# EAGLE board _EmbeddedPCB.0f97f602-2c7d-4791-9238-98ac81d9567d_LV1 (EAGLE 9.7.0)
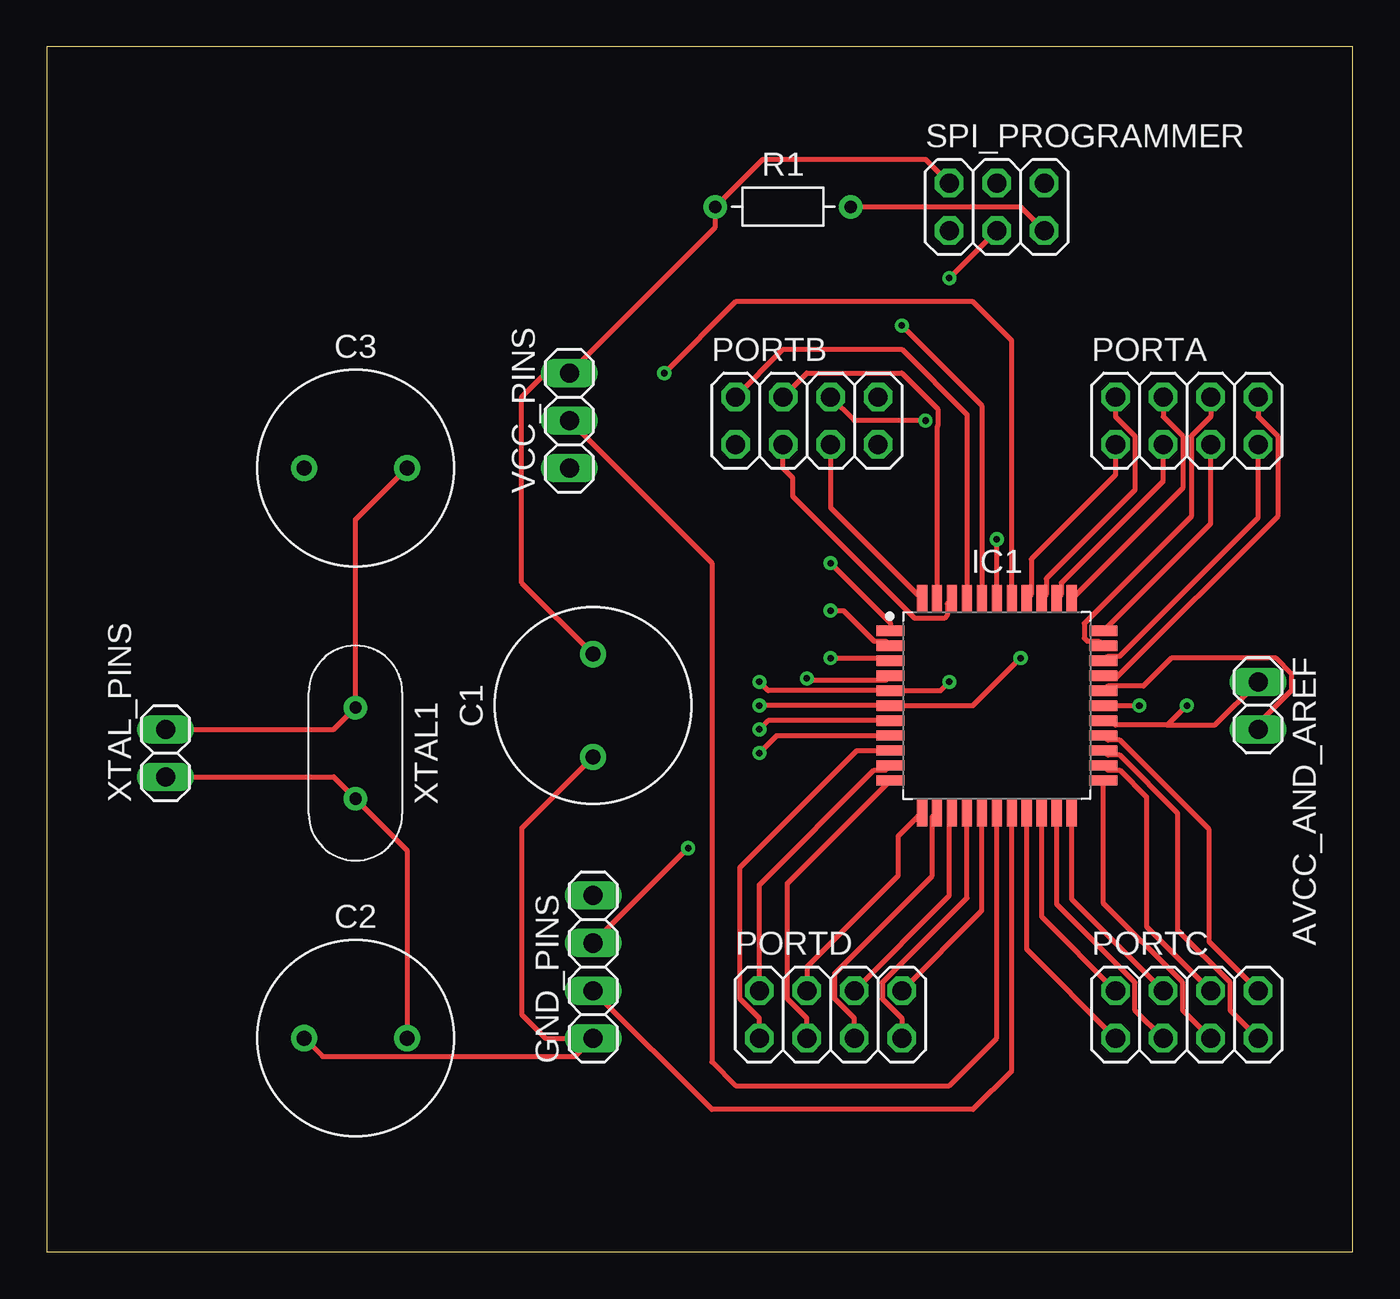
[diagram p0: board, top side]
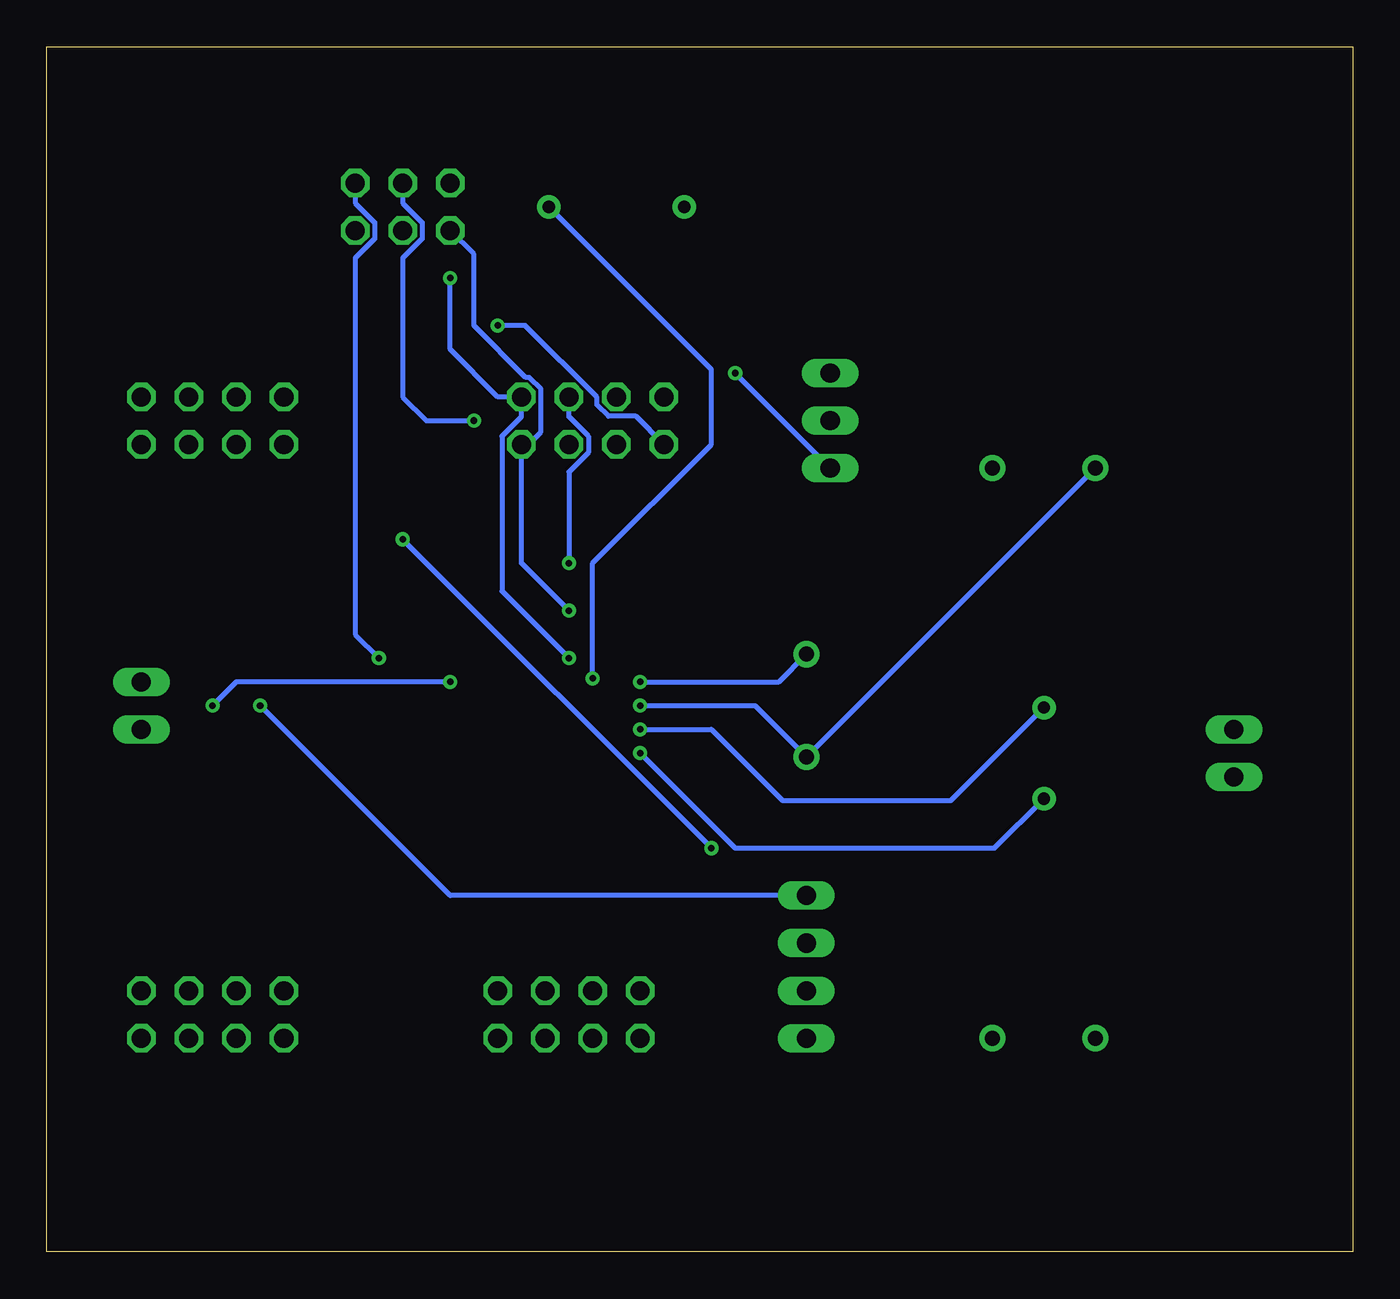
[diagram p1: board, bottom side, seen from below]

Size 69.83 x 64.44 mm. Coordinates in mm from the lower left corner, seen from the top.
Outline: 0,0 69.83,0 69.83,64.44 0,64.44 0,0
Copper layers (1*16): Top 0.035mm / dielectric 1.5mm / Bottom 0.035mm
Design rules "default": minimum track width 6mil, minimum drill 0.35mm, track to track 6mil, track to pad 6mil, pad to pad 6mil, via to via 6mil, smd to smd 6mil, copper to edge 40mil, drill to drill 6mil, minimum pad ring 10mil, minimum via ring 8mil, stop-mask expansion 4mil, vias tented up to drill 0mil, thermal gap 10mil

## Footprints (pad centres in the part's own frame; a part is rotated, then mirrored left to right if it is on the bottom)
1X02 = drill 1.016 long: 1 -1.27,0; 2 1.27,0
CAPRD550W60D1025H1250B = drill 0.8 pad 1.4: 1 -2.75,0; 2 2.75,0
1X04 = drill 1.016 long: 1 -3.81,0; 2 -1.27,0; 3 1.27,0; 4 3.81,0
QFP80P1200X1200X120-44 = smd 1.5 x 0.55: 1 -5.7,4; 2 -5.7,3.2; 3 -5.7,2.4; 4 -5.7,1.6; 5 -5.7,0.8; 6 -5.7,0; 7 -5.7,-0.8; 8 -5.7,-1.6; 9 -5.7,-2.4; 10 -5.7,-3.2; 11 -5.7,-4; 23 5.7,-4; 24 5.7,-3.2; 25 5.7,-2.4; 26 5.7,-1.6; 27 5.7,-0.8; 28 5.7,0; 29 5.7,0.8; 30 5.7,1.6; 31 5.7,2.4; 32 5.7,3.2; 33 5.7,4 | smd 0.55 x 1.5: 12 -4,-5.7; 13 -3.2,-5.7; 14 -2.4,-5.7; 15 -1.6,-5.7; 16 -0.8,-5.7; 17 0,-5.7; 18 0.8,-5.7; 19 1.6,-5.7; 20 2.4,-5.7; 21 3.2,-5.7; 22 4,-5.7; 34 4,5.7; 35 3.2,5.7; 36 2.4,5.7; 37 1.6,5.7; 38 0.8,5.7; 39 0,5.7; 40 -0.8,5.7; 41 -1.6,5.7; 42 -2.4,5.7; 43 -3.2,5.7; 44 -4,5.7
2X04 = drill 1.016 octagon: 1 -3.81,-1.27; 2 -3.81,1.27; 3 -1.27,-1.27; 4 -1.27,1.27; 5 1.27,-1.27; 6 1.27,1.27; 7 3.81,-1.27; 8 3.81,1.27
RESAD724W46L381D178B = drill 0.66 pad 1.26: 1 -3.62,0; 2 3.62,0
2X03 = drill 1.016 octagon: 1 -2.54,-1.27; 2 -2.54,1.27; 3 0,-1.27; 4 0,1.27; 5 2.54,-1.27; 6 2.54,1.27
1X03 = drill 1.016 long: 1 -2.54,0; 2 0,0; 3 2.54,0
XTALRR488W45L1150T500H350B = drill 0.657 pad 1.257: 1 -2.44,0; 2 2.44,0

## Placement (x,y rotation side)
AVCC_AND_AREF  PINHD-1X2  [1X02]  64.77,29.21 270 top
C1  100nF  [CAPRD550W60D1025H1250B]  29.21,29.21 90 top
C2  22pF  [CAPRD550W60D1025H1250B]  16.51,11.43 0 top
C3  22pF  [CAPRD550W60D1025H1250B]  16.51,41.91 0 top
GND_PINS  PINHD-1X4  [1X04]  29.21,15.24 90 top
IC1  ATMEGA16  [QFP80P1200X1200X120-44]  50.8,29.21 0 top
PORTA  PINHD-2X4  [2X04]  60.96,44.45 0 top
PORTB  PINHD-2X4  [2X04]  40.64,44.45 0 top
PORTC  PINHD-2X4  [2X04]  60.96,12.7 0 top
PORTD  PINHD-2X4  [2X04]  41.91,12.7 0 top
R1  10k  [RESAD724W46L381D178B]  39.37,55.88 0 top
SPI_PROGRAMMER  PINHD-2X3  [2X03]  50.8,55.88 0 top
VCC_PINS  PINHD-1X3  [1X03]  27.94,44.45 90 top
XTAL1  HC49  [XTALRR488W45L1150T500H350B]  16.51,26.67 270 top
XTAL_PINS  PINHD-1X2  [1X02]  6.35,26.67 90 top

## Library data of the parts
AVCC_AND_AREF GND_PINS PORTA PORTB PORTC PORTD SPI_PROGRAMMER VCC_PINS XTAL_PINS = Connector; CATEGORY: CONNECTOR; SUB-CATEGORY: PIN-HEADER
C1-C3 = Capacitor; CATEGORY: Capacitor
IC1 = IC_Embedded; CATEGORY: IC_Embedded; DESCRIPTION: IC MCU 8BIT 64KB FLASH 44TQFP; MANUFACTURER: Microchip Technology; MPN: ATMEGA644P-20AQR; OPERATING_TEMP: -40°C to 105°C; PART_STATUS: Active; SERIES: AVR® ATmega; SPEED: 20MHz; SUB-CATEGORY: Microcontroller
R1 = Resistor; CATEGORY: Resistor; SUB-CATEGORY: Fixed
XTAL1 = Frequency-Source; CATEGORY: Frequency-Source; SUB-CATEGORY: Crystal-2Pin

## Nets
AREF: AVCC_AND_AREF.2 IC1.29
GND: C1.1 C2.1 C3.1 GND_PINS.1 IC1.6 SPI_PROGRAMMER.6
GND1: GND_PINS.2 IC1.18
GND2: GND_PINS.3 IC1.39
GND3: GND_PINS.4 IC1.28
MISO: IC1.2 PORTB.7 SPI_PROGRAMMER.1
MOSI: IC1.1 PORTB.6 SPI_PROGRAMMER.4
N$1: IC1.37 PORTA.1
N$2: IC1.35 PORTA.3
N$3: IC1.33 PORTA.5
N$4: IC1.31 PORTA.7
N$5: IC1.36 PORTA.2
N$6: IC1.34 PORTA.4
N$7: IC1.32 PORTA.6
N$8: IC1.30 PORTA.8
N$9: IC1.40 PORTB.1
N$10: IC1.42 PORTB.3
N$11: IC1.44 PORTB.5
N$13: IC1.41 PORTB.2
N$14: IC1.43 PORTB.4
N$17: IC1.9 PORTD.1
N$18: IC1.11 PORTD.3
N$19: IC1.13 PORTD.5
N$20: IC1.15 PORTD.7
N$21: IC1.10 PORTD.2
N$22: IC1.12 PORTD.4
N$23: IC1.14 PORTD.6
N$24: IC1.16 PORTD.8
N$25: IC1.19 PORTC.1
N$26: IC1.21 PORTC.3
N$27: IC1.23 PORTC.5
N$28: IC1.25 PORTC.7
N$29: IC1.20 PORTC.2
N$30: IC1.22 PORTC.4
N$31: IC1.24 PORTC.6
N$32: IC1.26 PORTC.8
RESET: IC1.4 R1.2 SPI_PROGRAMMER.5
SCK: IC1.3 PORTB.8 SPI_PROGRAMMER.3
VCC: AVCC_AND_AREF.1 C1.2 IC1.5 IC1.27 R1.1 SPI_PROGRAMMER.2 VCC_PINS.3
VCC1: IC1.17 VCC_PINS.2
VCC2: IC1.38 VCC_PINS.1
XTAL1: C2.2 IC1.8 XTAL1.2 XTAL_PINS.1
XTAL2: C3.2 IC1.7 XTAL1.1 XTAL_PINS.2

## Tracks (layer width: path | path; a pad name or v marks a point on that pad's centre or on a via)
AREF
  Top 0.254: AVCC_AND_AREF.2 64.77,28.25 66.57,30.05 66.57,30.91 65.73,31.75 60.13,31.75 58.64,30.26 56.75,30.26 IC1.29
GND  (via drill 0.35)
  Top 0.254: C2.1 14.74,10.45 28.27,10.45 28.27,10.48 GND_PINS.1 26.67,11.43 25.4,12.7 25.4,22.65 C1.1 | v38.1,29.21 IC1.6 49.53,29.21 v52.07,31.75
  Bottom 0.254: v38.1,29.21 31.96,29.21 C1.1 C3.1 | v52.07,31.75 53.34,33.02 53.34,53.14 52.3,54.18 52.3,55.04 53.34,56.08 SPI_PROGRAMMER.6
GND1
  Top 0.254: IC1.18 51.6,9.69 49.53,7.62 35.56,7.62 GND_PINS.2
GND2  (via drill 0.35)
  Top 0.254: IC1.39 v50.8,38.1 | GND_PINS.3 v34.29,21.59
  Bottom 0.254: v34.29,21.59 v50.8,38.1
GND3  (via drill 0.35)
  Top 0.254: IC1.28 v58.42,29.21
  Bottom 0.254: v58.42,29.21 48.26,19.05 GND_PINS.4
MISO  (via drill 0.35)
  Top 0.254: IC1.2 44.85,32.66 44.23,32.66 42.6,34.29 v41.91,34.29
  Bottom 0.254: v41.91,34.29 44.45,36.83 PORTB.7 44.08,43.18 43.41,43.85 43.41,46.15 44.02,46.76 44.22,46.76 46.99,49.53 46.99,53.34 SPI_PROGRAMMER.1
MOSI  (via drill 0.35)
  Top 0.254: v41.91,36.83 45.1,33.64 IC1.1 | v46.99,44.45 43.18,44.45 PORTB.6
  Bottom 0.254: PORTB.6 41.91,44.65 40.87,43.61 40.87,42.75 41.91,41.71 v41.91,36.83 | SPI_PROGRAMMER.4 50.8,56.08 49.76,55.04 49.76,54.18 50.8,53.14 50.8,45.72 49.53,44.45 v46.99,44.45
N$1
  Top 0.254: IC1.37 52.65,35.16 52.65,37.05 57.15,41.55 PORTA.1
N$2
  Top 0.254: IC1.35 54.25,35.16 54.25,35.78 59.69,41.22 PORTA.3
N$3
  Top 0.254: IC1.33 62.23,38.94 PORTA.5
N$4
  Top 0.254: IC1.31 56.75,31.86 57.37,31.86 64.77,39.26 PORTA.7
N$5
  Top 0.254: IC1.36 53.45,35.16 53.45,36 58.19,40.75 58.19,43.61 57.15,44.65 PORTA.2
N$6
  Top 0.254: PORTA.4 59.69,44.65 60.73,43.61 60.73,40.84 IC1.34
N$7
  Top 0.254: PORTA.6 62.23,44.65 61.19,43.61 61.19,39.32 55.47,33.6 55.47,32.82 55.63,32.66 56.25,32.66 IC1.32
N$8
  Top 0.254: PORTA.8 64.77,44.65 65.81,43.61 65.81,39.32 57.15,30.66 56.65,30.66 IC1.30
N$9  (via drill 0.35)
  Top 0.254: v45.72,49.53 50,45.25 IC1.40
  Bottom 0.254: PORTB.1 38.33,44.68 39.8,44.68 40.41,45.29 40.41,45.69 44.25,49.53 v45.72,49.53
N$10
  Top 0.254: IC1.42 48.15,34.66 48.15,34.04 47.99,33.88 46.41,33.88 39.9,40.39 39.9,41.38 39.37,41.91 PORTB.3
N$11
  Top 0.254: IC1.44 41.91,39.8 PORTB.5
N$13
  Top 0.254: PORTB.2 39.37,48.26 45.72,48.26 49.2,44.78 IC1.41
N$14
  Top 0.254: PORTB.4 40.64,46.99 45.72,46.99 47.65,45.06 47.65,44.18 47.6,44.13 IC1.43
N$17
  Top 0.254: PORTD.1 38.1,12.5 37.06,13.54 37.06,20.55 43.32,26.81 IC1.9
N$18
  Top 0.254: PORTD.3 40.64,12.5 39.6,13.54 39.6,19.71 IC1.11
N$19
  Top 0.254: PORTD.5 43.18,12.5 42.14,13.54 42.14,14.89 47.35,20.11 47.35,23.26 IC1.13
N$20
  Top 0.254: PORTD.7 45.72,12.5 44.68,13.54 44.68,14.4 49.2,18.92 IC1.15
N$21
  Top 0.254: PORTD.2 38.1,19.63 44.23,25.76 44.85,25.76 IC1.10
N$22
  Top 0.254: PORTD.4 40.64,15.24 45.53,20.13 45.53,22.24 IC1.12
N$23
  Top 0.254: PORTD.6 48.26,19.05 48.26,23.37 IC1.14
N$24
  Top 0.254: IC1.16 50,18.25 PORTD.8
N$25
  Top 0.254: PORTC.1 52.4,16.18 IC1.19
N$26
  Top 0.254: PORTC.3 58.19,12.93 58.19,14.4 54,18.59 IC1.21
N$27
  Top 0.254: PORTC.5 60.73,12.93 60.73,14.4 56.5,18.63 IC1.23
N$28
  Top 0.254: PORTC.7 63.27,12.93 63.27,14.4 60.48,17.2 60.48,23.45 57.37,26.56 56.75,26.56 IC1.25
N$29
  Top 0.254: PORTC.2 53.2,17.92 IC1.20
N$30
  Top 0.254: PORTC.4 54.8,18.86 IC1.22
N$31
  Top 0.254: PORTC.6 58.8,17.4 58.8,24.33 57.37,25.76 56.75,25.76 IC1.24
N$32
  Top 0.254: PORTC.8 62.15,16.59 62.15,22.58 57.37,27.36 56.75,27.36 IC1.26
RESET  (via drill 0.35)
  Top 0.254: IC1.4 44.85,30.56 40.74,30.56 v40.64,30.67 | R1.2 52.07,55.88 SPI_PROGRAMMER.5
  Bottom 0.254: R1.2 34.29,47.18 34.29,43.18 40.64,36.83 v40.64,30.67
SCK  (via drill 0.35)
  Top 0.254: v41.91,31.75 44.96,31.75 IC1.3 | SPI_PROGRAMMER.3 v48.26,52.07
  Bottom 0.254: v41.91,31.75 45.49,35.33 45.49,43.61 44.45,44.65 PORTB.8 45.72,45.72 48.26,48.26 v48.26,52.07
VCC  (via drill 0.35)
  Top 0.254: AVCC_AND_AREF.1 62.45,28.16 59.91,28.16 | 59.91,28.16 57.15,28.16 56.9,28.41 IC1.27 | v38.1,30.48 38.57,30.01 IC1.5 47.79,30.01 v48.26,30.48 | C1.2 25.4,35.77 25.4,45.72 26.67,46.99 VCC_PINS.3 35.75,54.8 R1.1 38.29,58.42 46.99,58.42 SPI_PROGRAMMER.2 | 59.91,28.16 v60.96,29.21
  Bottom 0.254: v38.1,30.48 30.69,30.48 C1.2 | v48.26,30.48 59.69,30.48 v60.96,29.21
VCC1
  Top 0.254: IC1.17 50.8,11.43 48.26,8.89 36.83,8.89 35.56,10.16 35.56,36.83 VCC_PINS.2
VCC2  (via drill 0.35)
  Top 0.254: IC1.38 51.6,48.73 49.53,50.8 36.83,50.8 v33.02,46.99
  Bottom 0.254: v33.02,46.99 VCC_PINS.1
XTAL1  (via drill 0.35)
  Top 0.254: XTAL_PINS.1 15.34,25.4 XTAL1.2 19.26,21.48 C2.2 | IC1.8 39.04,27.61 v38.1,26.67
  Bottom 0.254: v38.1,26.67 33.02,21.59 19.15,21.59 XTAL1.2
XTAL2  (via drill 0.35)
  Top 0.254: XTAL_PINS.2 15.34,27.94 XTAL1.1 16.51,39.16 C3.2 | IC1.7 38.57,28.41 v38.1,27.94
  Bottom 0.254: v38.1,27.94 34.29,27.94 30.48,24.13 21.49,24.13 XTAL1.1